# EAGLE board power supply (EAGLE 7.1.0)
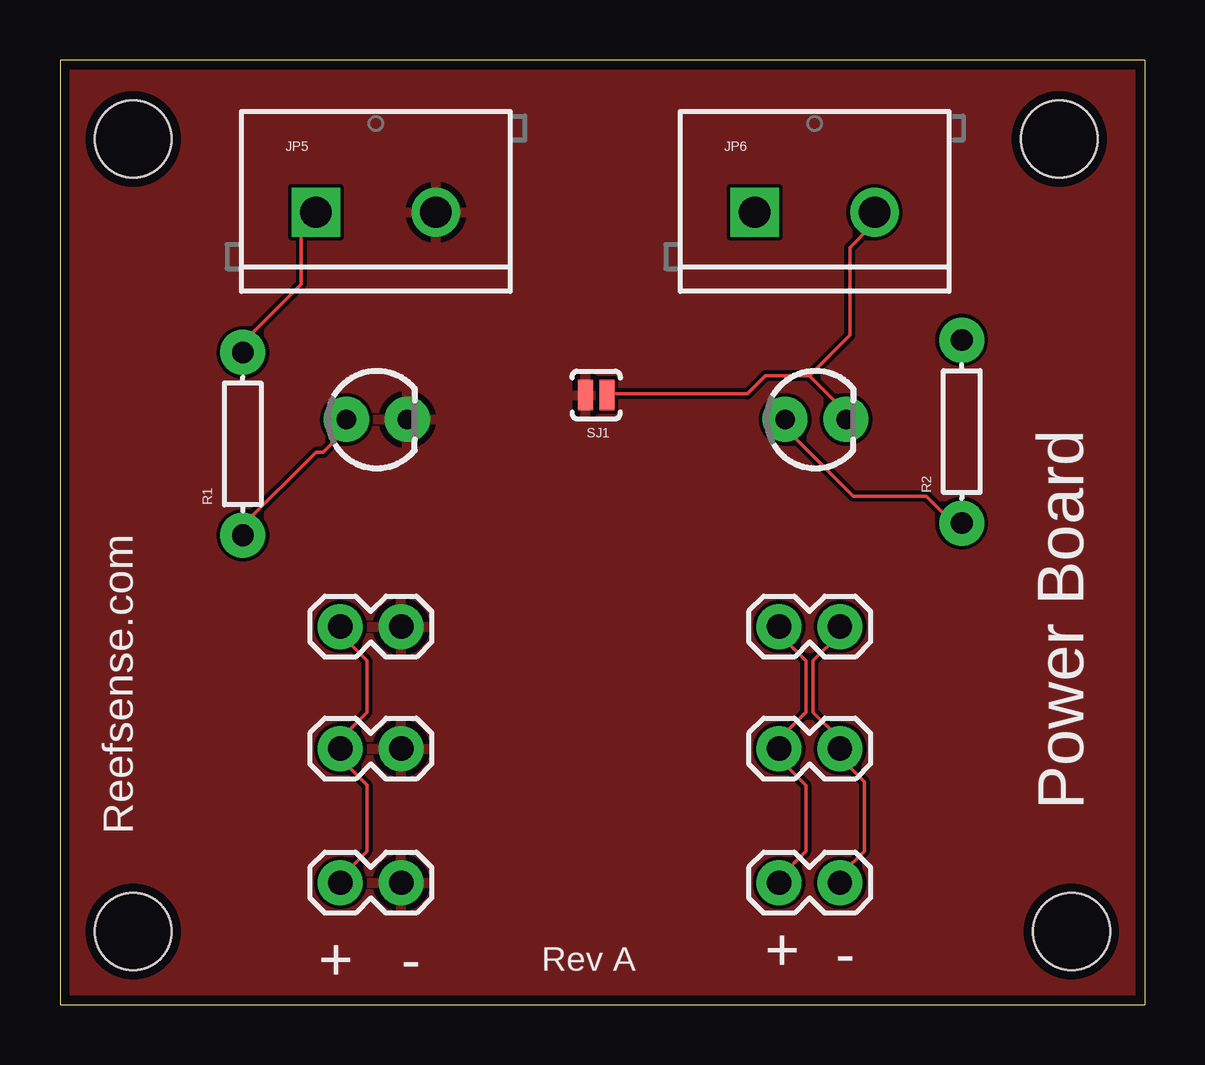
[diagram p0: board, top side]
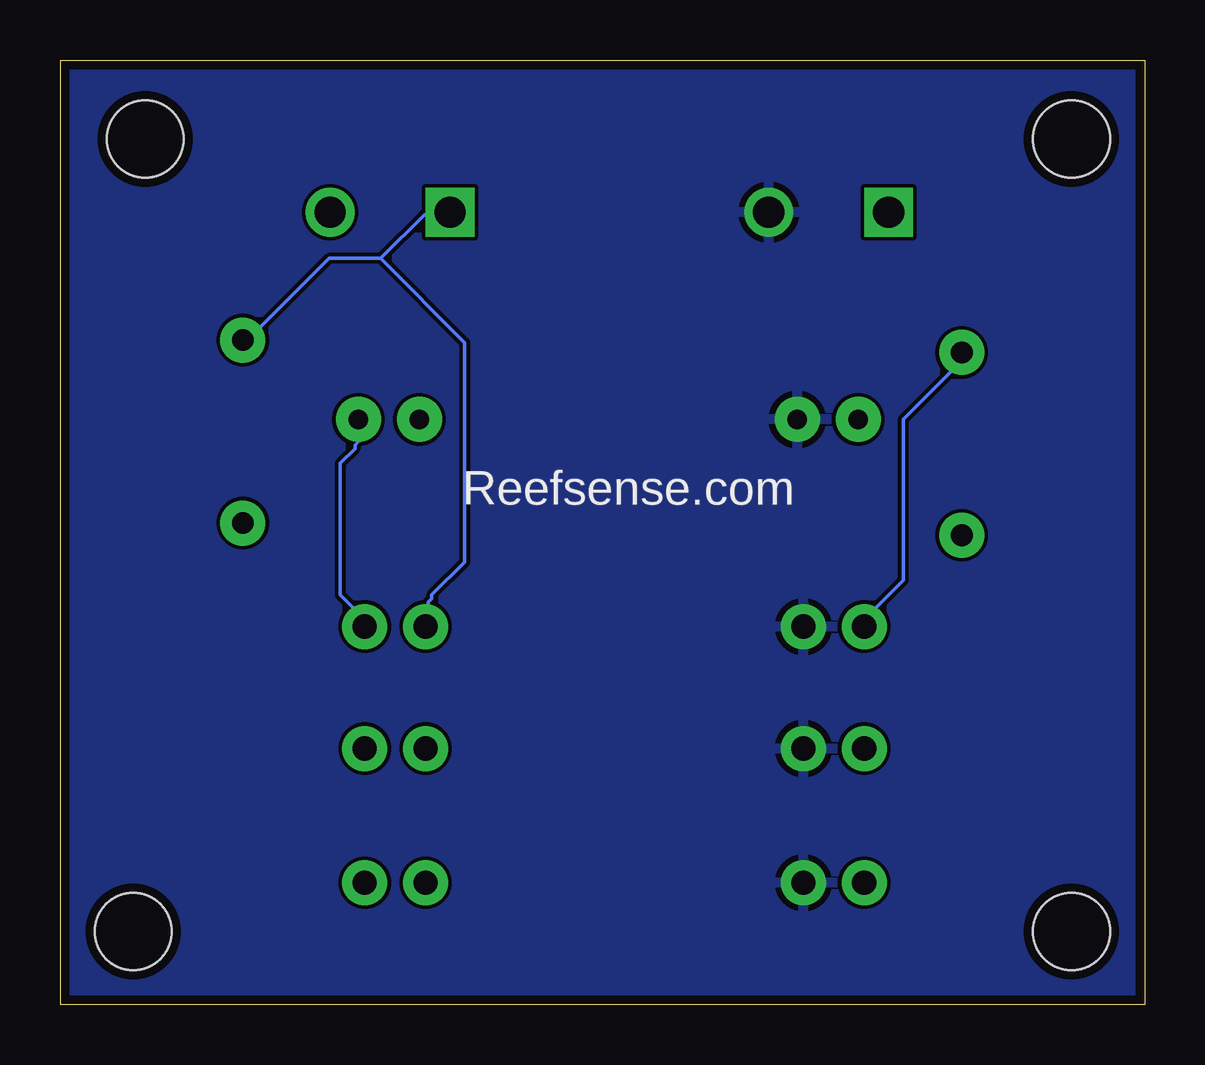
[diagram p1: board, bottom side, seen from below]

Size 45.21 x 39.36 mm. Coordinates in mm from the lower left corner, seen from the top.
Outline: 0,0 45.21,0 45.21,39.36 0,39.36 0,0
Copper layers (1*16): Top 0.0356mm / dielectric 1.5011mm / Bottom 0.0356mm
Design rules "LaenPCBOrder": minimum track width 6mil, minimum drill 13mil, track to track 6mil, track to pad 6mil, pad to pad 6mil, via to via 6mil, smd to smd 6mil, copper to edge 15mil, drill to drill 6mil, minimum pad ring 7mil, minimum via ring 7mil, stop-mask expansion 3mil, vias tented up to drill 0mil, thermal gap 10mil
Holes 3.2 mm at 3.05,36.07 3.05,3.05 42.16,3.05 41.66,36.07

## Footprints (pad centres in the part's own frame; a part is rotated, then mirrored left to right if it is on the bottom)
1X02 = drill 1.016 pad 1.88: 1 0,0; 2 2.54,0
SCREWTERMINAL-5MM-2 = drill 1.3 pad 2.032 square: 1 0,0 | drill 1.3 pad 2.032: 2 5,0
LED3MM = drill 0.813 pad 1.88: A -1.27,0; K 1.27,0
AXIAL-0.3 = drill 0.9 pad 1.88: P$1 -3.81,0; P$2 3.81,0
SJ_2S-NO = smd 0.635 x 1.27: 1 -0.45,0; 2 0.45,0

## Placement (x,y rotation side)
JP1  9VDC  [1X02]  29.97,15.75 0 top
JP2  9VDC  [1X02]  29.97,10.67 0 top
JP3  9VDC  [1X02]  29.97,5.08 0 top
JP5  5 VDC  [SCREWTERMINAL-5MM-2]  10.67,33.02 0 top
JP6  9 VDC  [SCREWTERMINAL-5MM-2]  28.96,33.02 0 top
JP7  5VDC  [1X02]  11.68,15.75 0 top
JP8  5VDC  [1X02]  11.68,10.67 0 top
JP9  5VDC  [1X02]  11.68,5.08 0 top
LED1  [LED3MM]  13.21,24.38 0 top
LED2  [LED3MM]  31.5,24.38 0 top
R1  [AXIAL-0.3]  7.62,23.37 90 top
R2  [AXIAL-0.3]  37.59,23.88 90 top
SJ1  Join GND  [SJ_2S-NO]  22.35,25.4 0 top

## Library data of the parts
JP1-JP3 JP7-JP9 = SparkFun-Connectors
JP5 JP6 = SparkFun-Connectors; STOREFRONT_ID: PRT-08432
LED1 LED2 = SparkFun-LED
R1 R2 = SparkFun-Resistors
SJ1 = SparkFun-Retired

## Nets
5V: JP5.1 JP7.1 JP8.1 JP9.1 R1.P$2
GND: JP5.2 JP7.2 JP8.2 JP9.2 LED1.K SJ1.1
N$1: LED1.A R1.P$1
N$3: LED2.A R2.P$1
N$4: JP1.2 JP2.2 JP3.2 JP6.2 LED2.K SJ1.2
VCC: JP1.1 JP2.1 JP3.1 JP6.1 R2.P$2

## Tracks (layer width: path | path; a pad name or v marks a point on that pad's centre or on a via)
5V
  Top 0.152: R1.P$2 7.62,27.58 10.06,30.02 10.06,32.31 10.67,32.92 JP5.1 | 11.73,10.67 11.73,10.21 12.8,9.14 12.8,6.4 12.19,5.79 12.19,5.64 11.73,5.18 JP9.1 | 11.73,10.67 11.73,11.12 12.8,12.19 12.8,14.33 11.73,15.39 11.73,15.7 JP7.1 | 11.73,10.67 JP8.1
  Bottom 0.152: R1.P$2 7.62,26.82 10.06,24.38 10.06,17.68 11.58,16.15 11.58,15.85 JP7.1
GND
  pour Top: -13.72,46.23 110.24,46.23 109.73,-1.52 -13.72,-2.54
  pour Bottom: -13.72,-2.03 110.74,-3.05 110.24,42.67 -14.22,43.18
N$1
  Top 0.152: R1.P$1 7.62,19.96 10.67,23.01 10.97,23.01 11.89,23.93 11.89,24.38 LED1.A
N$3
  Top 0.152: LED2.A 30.33,24.38 30.33,23.93 33.07,21.18 36.12,21.18 37.19,20.12 37.49,20.12 R2.P$1
N$4
  Top 0.152: JP3.2 32.61,5.18 32.61,5.49 33.53,6.4 33.53,9.3 32.61,10.21 32.61,10.67 JP2.2 32.46,10.67 32.46,11.12 31.39,12.19 31.39,14.33 32.46,15.39 32.46,15.7 JP1.2 | 31.24,26.21 29.41,26.21 28.65,25.45 22.86,25.45 SJ1.2 | 31.24,26.21 32.77,24.69 LED2.K | 31.24,26.21 32.92,27.89 32.92,31.55 33.83,32.46 33.83,32.92 JP6.2
  Bottom 0.152: LED2.K 32.77,23.47 32.92,23.32 32.92,23.16 33.53,22.55 33.53,17.07 32.61,16.15 32.61,15.85 JP1.2
VCC
  Top 0.152: 30.02,10.67 30.02,10.21 31.09,9.14 31.09,6.4 30.48,5.79 30.48,5.64 30.02,5.18 JP3.1 | 30.02,10.67 30.02,11.12 31.09,12.19 31.09,14.33 30.02,15.39 30.02,15.7 JP1.1 | 30.02,10.67 JP2.1
  Bottom 0.152: 31.85,31.09 33.98,31.09 36.88,28.19 37.03,28.19 37.49,27.74 R2.P$2 | 31.85,31.09 30.02,32.92 28.96,32.92 JP6.1 | 31.85,31.09 28.35,27.58 28.35,18.44 29.72,17.07 29.72,16.92 29.87,16.76 29.87,15.85 JP1.1

## Text on the board
tNames: Power Board | Reefsense.com | - | Rev A | + | - | +
bNames: Reefsense.com